# Altium PCB TailLightPrototype.PcbDoc
Units mm, origin at the board's own origin, x right, y up, seen from the top; angles counter-clockwise.
Board outline 55 x 30 mm, 2 copper layers (Top Layer, Bottom Layer); 8 components, 6 nets, 33 pads, 333 vias.
Unrouted connection lines stored in the file: 2.
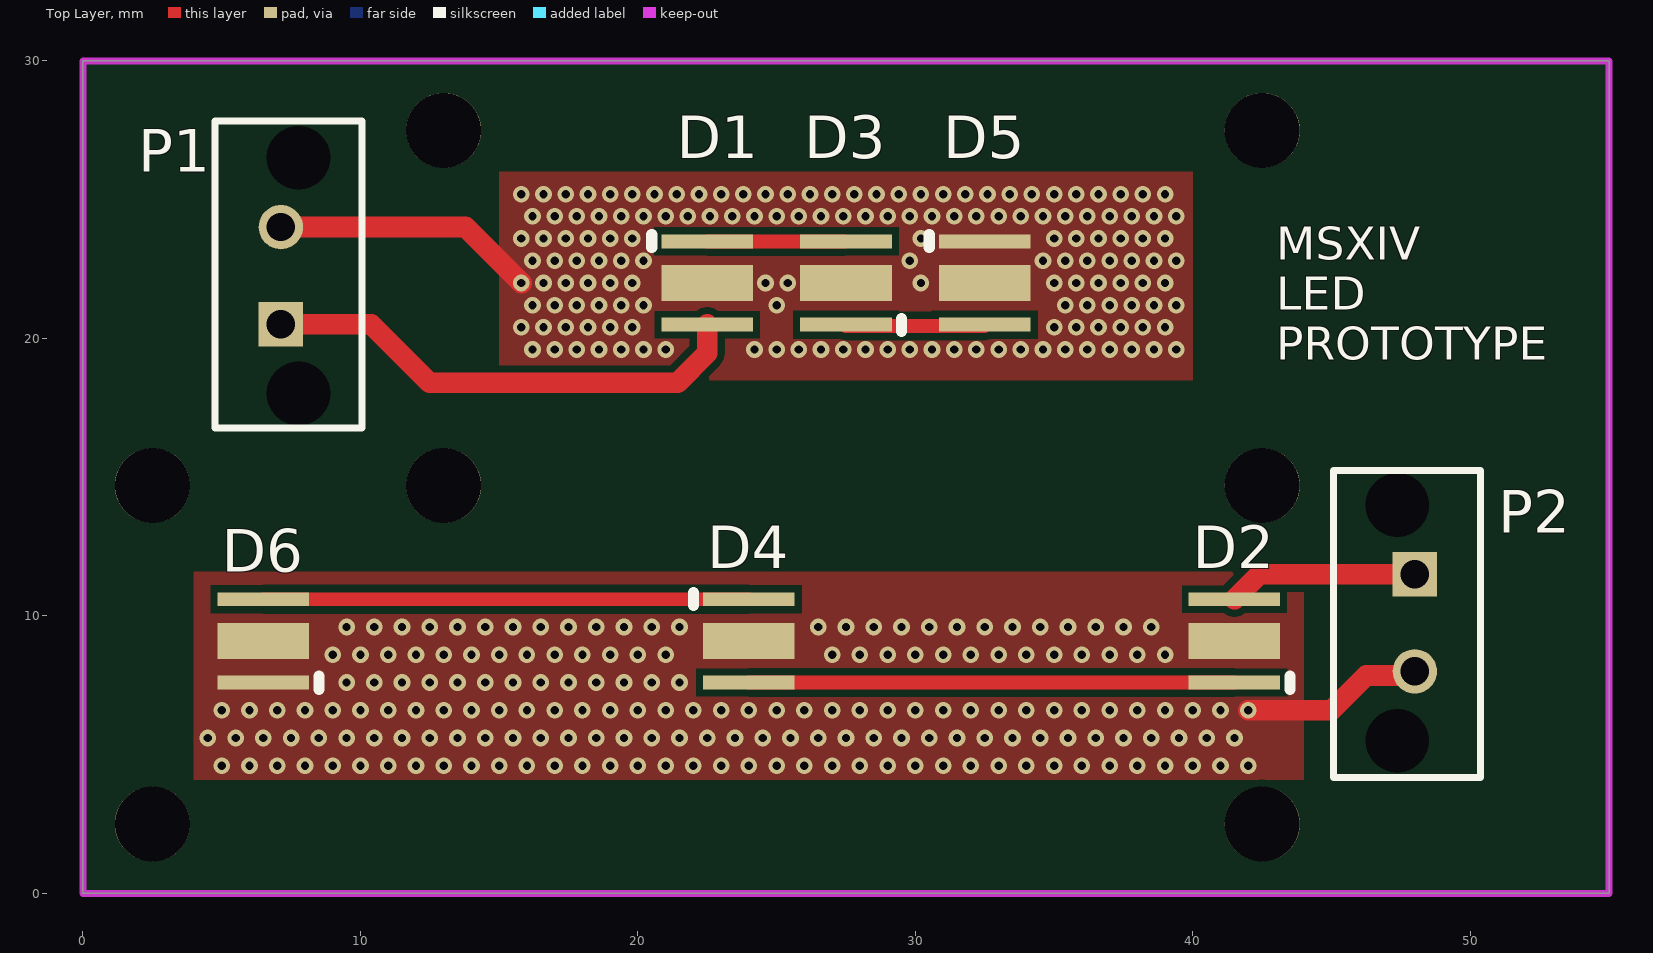
[diagram p0: Top Layer view]
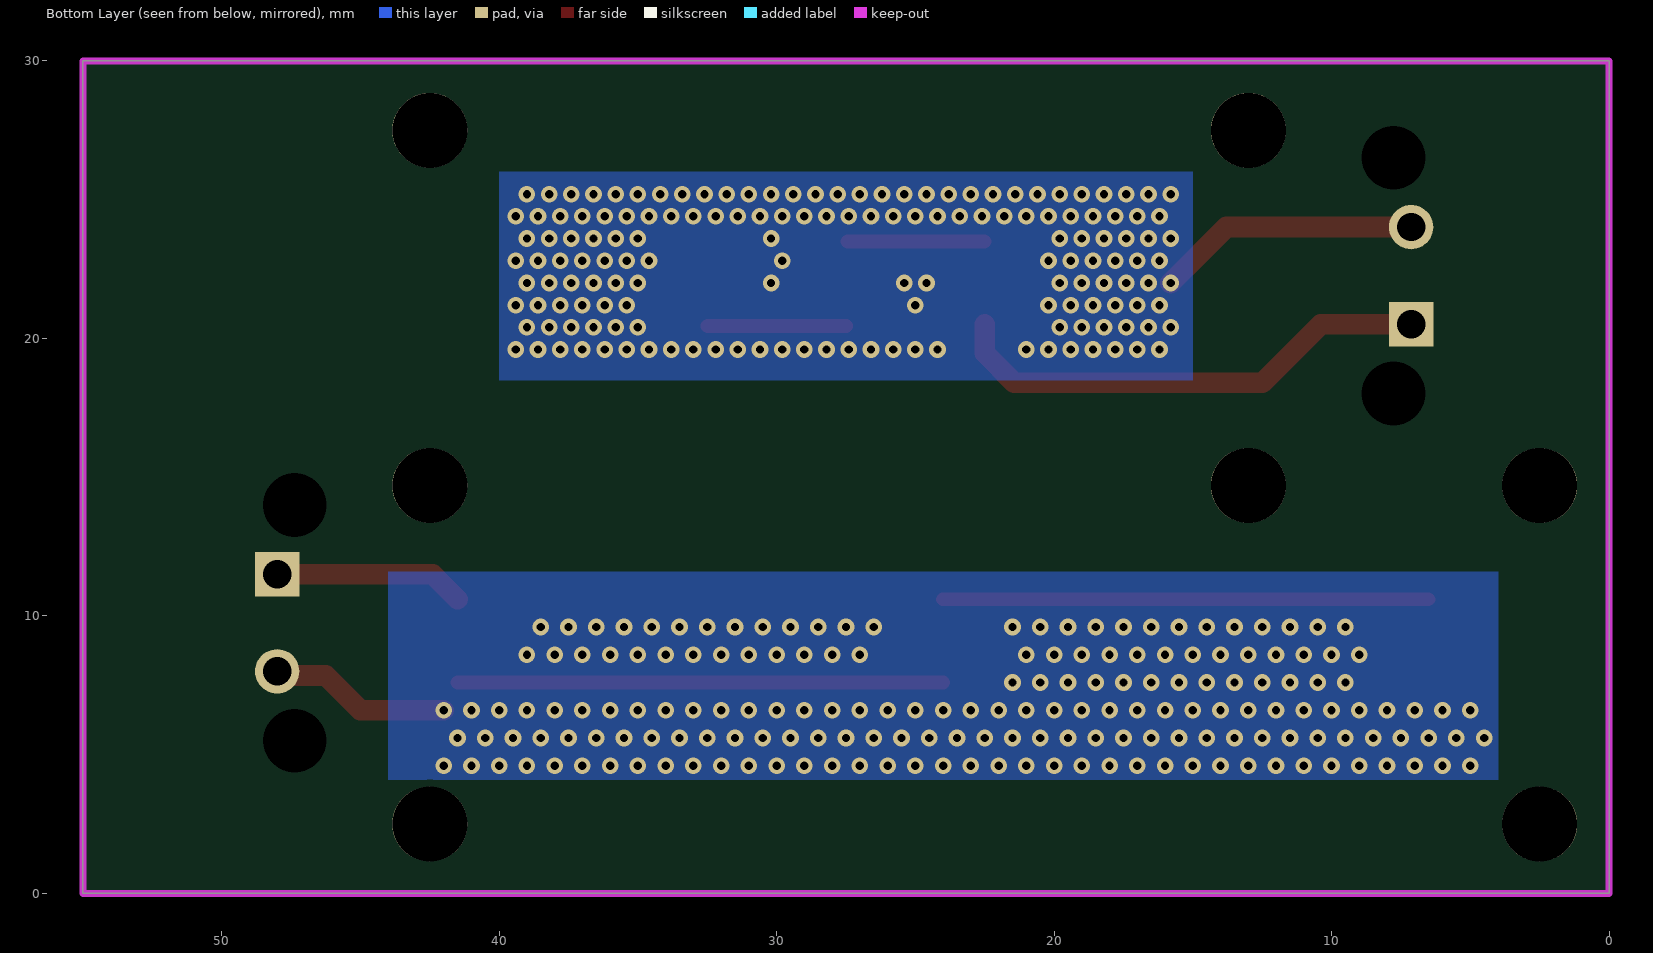
[diagram p1: Bottom Layer view, seen from below]
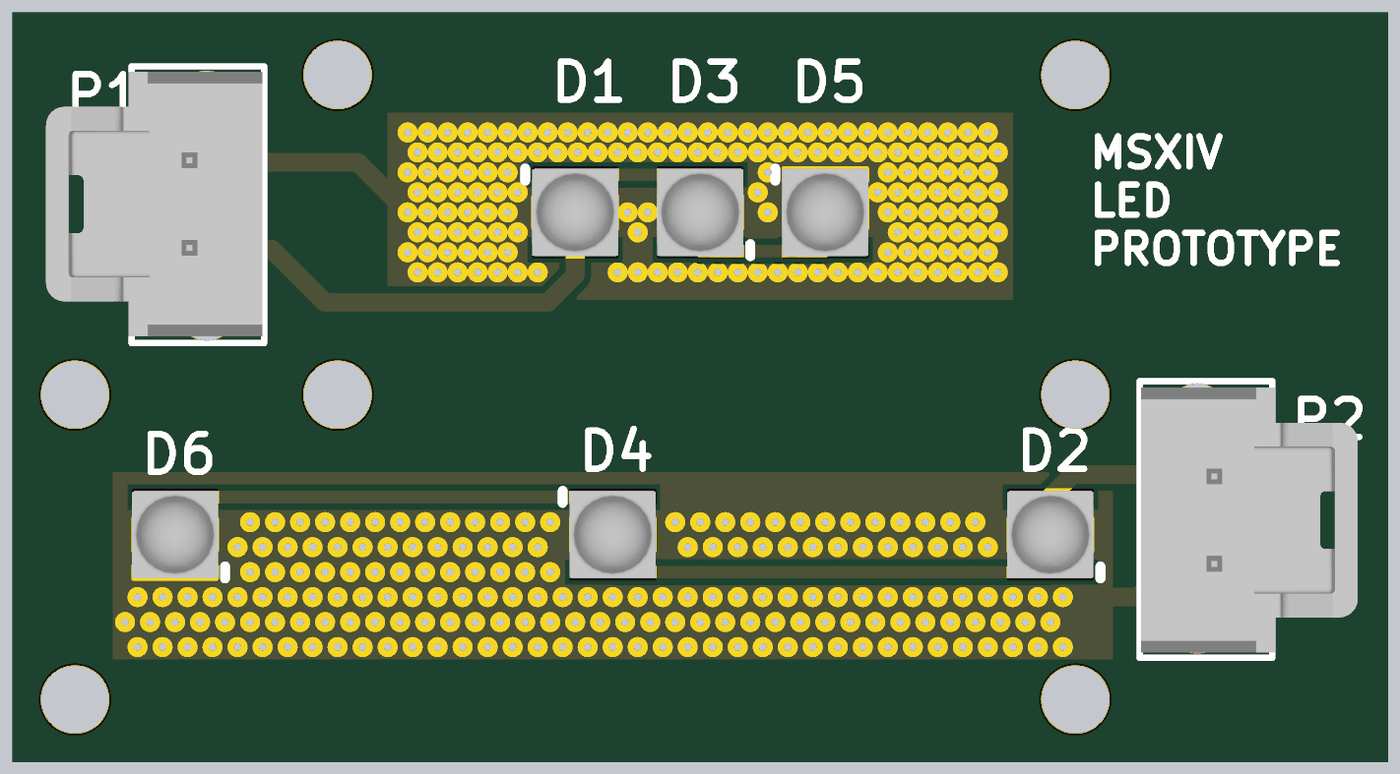
[diagram p2: 3D render of the assembled board from above, using the file's embedded part models]

## Layer stack, top to bottom
Top Solder: solder mask 0.0102, Solder Resist, Dk 3.5
Top Layer: signal copper 0.0356
Dielectric 1: dielectric 0.32, FR-4, Dk 4.8
Bottom Layer: signal copper 0.0356
Bottom Solder: solder mask 0.0102, Solder Resist, Dk 3.5

## Board outline
0,0 55,0 55,30 0,30

## Design rules (kind name [scope] priority, off if disabled: settings)
Clearance [All] p1: gap=0.254 ignorepadtopadclearanceinfootprint=FALSE except(0: Arc-Hole Track-Hole SMDPad-Hole THPad-Hole Via-Hole Fill-Hole Poly-Hole Region-Hole Text-Hole)
PolygonConnect [All] p1: connectstyle=Direct reliefconductorwidth=0.254 reliefentries=4 polygonreliefangle="90 Angle" airgapwidth=0.254
RoutingVias [All] p1: holewidth=0.711 width=1.27 viastyle="Through Hole" minholewidth=0.711 minwidth=1.27 maxholewidth=0.711 maxwidth=1.27
SolderMaskExpansion [All] p1: expansion=0.102
Width [All] p1: maxlimit=10 minlimit=0.254 preferedwidth=0.254
30 further rules are at their usual default settings.

## Components (designator, comment, footprint, x,y, rotation, side; value= is the part's Value field where it differs from the comment)
D1 "LED XLAMP XP-E RED SMD" "LED CREE XP-E2 1414 2-SMD" 22.5,22 r90 top
D2 "LED XLAMP XP-E RED SMD" "LED CREE XP-E2 1414 2-SMD" 41.5,9.1 r270 top
D3 "LED XLAMP XP-E RED SMD" "LED CREE XP-E2 1414 2-SMD" 27.5,22 r270 top
D4 "LED XLAMP XP-E RED SMD" "LED CREE XP-E2 1414 2-SMD" 24,9.1 r90 top
D5 "LED XLAMP XP-E RED SMD" "LED CREE XP-E2 1414 2-SMD" 32.5,22 r90 top
D6 "LED XLAMP XP-E RED SMD" "LED CREE XP-E2 1414 2-SMD" 6.5,9.1 r270 top
P1 "CONN 2POS ULTRA-FIT 0.138\"" "CONN, 2POS ULTRA-FIT" 7.132,20.514 r90 top
P2 "CONN 2POS ULTRA-FIT 0.138\"" "CONN, 2POS ULTRA-FIT" 48,11.5 r270 top

## Footprints (in the part's own frame and the unit in brackets; to place one, negate y for a bottom-side part, rotate by r counter-clockwise, add the part's x,y. Pads: shape width x height; smd on the part's side, far side on the other; paste and mask are expansions set on the pad)
"CONN, 2POS ULTRA-FIT" [mm] "2 Positions Header, Shrouded Connector 0.138\" (3.50mm) Through Hole Gold"
  rect 1.6x1.6 hole 1.02: 1(0,0)
  round 1.6 hole 1.02: 2(3.5,0)
  round 1.6 hole 2.3: ""(-2.5,-0.63) ""(6,-0.63)
  silkscreen extent -3.74,-2.93 7.33,2.37, body extent -3.48,-2.87 7.12,5.79, height 13.85
"LED CREE XP-E2 1414 2-SMD" [mm]
  rect 0.5x3.3 smd: 1(-1.5,0) 3(1.5,0)
  rect 1.3x3.3 smd: 2(0,0)
  silkscreen extent 1.27,2 1.75,2, body extent -1.73,-1.73 1.73,1.73, height 2.28

## Part data
D1 D2 D3 D4 D5 D6: "LED Lighting Color XLamp?XP-E2 Red 623nm (620nm ~ 625nm) 1414 (3535 Metric)", Case/Package=SMD/SMT, Color=Red, Forward Voltage=2.2V, Manufacturer=Cree, Manufacturer Part Number=XPEBRD-L1-0000-00902, Max Current Rating=1A, Supplier Part Number 1="XP-E2 RED", Test Current=350mA, Test Temperature=25°C, Thermal Resistance of Package=5°C/W, Lead Free="Lead Free", Mount="Surface Mount", Packaging="Tape and Reel", Pricing 1="1=2, 10=1.9, 100=1.6998, 250=1.54584, 500=1.44786 (USD)", Stock 1=1651, Supplier 1=Digi-Key, Viewing Angle=130°, Wavelength=625nm
P1 P2: "2 Positions Header, Shrouded Connector 0.138\" (3.50mm) Through Hole Gold", Current Rating=-, Insulation Color=Black, Manufacturer 1="Molex, LLC", Manufacturer Part Number 1=1722861302, Material Flammability Rating="UL94 V-0", Operating Temperature="-40°C ~ 120°C", Supplier Part Number 1=WM11673-ND, Voltage=400V, ComponentLink1Description=http://www.molex.com/pdm_docs/sd/1722861302_sd.pdf, ComponentLink1URL=http://www.molex.com/pdm_docs/sd/1722861302_sd.pdf, Connector Type=Header, Contact Finish - Mating=Gold, Contact Finish - Post=Tin, Contact Finish Thickness - Mating="30µin (0.76µm)", Contact Finish Thickness - Post="60µin (1.52µm)", Contact Length - Mating=-, Contact Length - Post="0.126\" (3.20mm)", Contact Material="Copper Alloy", Contact Shape=Square, Contact Type="Male Pin", Fastening Type="Latch Holder", Ingress Protection=-, Insulation Height="0.465\" (11.80mm)", Insulation Material="Liquid Crystal Polymer (LCP)", Mated Stacking Heights=26.99mm, Mounting Type="Through Hole", Number of Positions=2, Number of Positions Loaded=All, Number of Rows=1, Overall Contact Length=-, Packaging=Tray, Part Status=Active, Pitch - Mating="0.138\" (3.50mm)", Row Spacing - Mating=-, Series=UltraFit, Shrouding="Shrouded - 4 Wall", Style="Board to Board or Cable", Supplier 1=Digi-Key, Termination="Kinked Pin, Solder"

## Free pads (board coordinates)
  round 2.7 hole 2.7: 1(2.5,2.5) 2(42.5,2.5) 3(42.5,27.5) 4(13,27.5) ""(2.5,14.7) ""(13,14.7) ""(42.5,14.7)

## Via types
v1: diameter 0.6, hole 0.3, Top Layer to Bottom Layer, 333 vias

## Nets (pads, with @x,y where several pads share a name; then routed paths per layer and width w, separated by ;. In a path a pad name is that pad's centre, name@x,y a point inside that pad or via, vN(x,y) a via of type N, cw(c..) or ccw(c..) an arc to the next point about the centre after c; other vN are vias at no path point)
6V6: D1.1 D2.1 P1.1 P2.1 | length 24.6
  Top Layer w0.75: P1.1 10.386,20.514 12.5,18.4 21.423,18.4 22.5,19.477 D1.1 ; D2.1 42.4,11.5 P2.1
GND: D1.2 D2.2 D3.2 D4.2 D5.2 D5.3 D6.2 D6.3 P1.2 P2.2 | length 16.2
  Top Layer w0.75: P1.2@7,24.014 P1.2 13.786,24.014 v1(15.8,22) ; v1(42,6.6) 45,6.6 46.25,7.85 P2.2@48,7.85
  other v1: 5,4.6 6,4.6 7,4.6 8,4.6 9,4.6 10,4.6 11,4.6 12,4.6 13,4.6 14,4.6 15,4.6 16,4.6 17,4.6 18,4.6 19,4.6 20,4.6 21,4.6 22,4.6 23,4.6 24,4.6 25,4.6 26,4.6 27,4.6 28,4.6 29,4.6 30,4.6 31,4.6 32,4.6 33,4.6 34,4.6 35,4.6 36,4.6 37,4.6 38,4.6 39,4.6 40,4.6 41,4.6 42,4.6 4.5,5.6 5.5,5.6 6.5,5.6 7.5,5.6 8.5,5.6 9.5,5.6 10.5,5.6 11.5,5.6 12.5,5.6 13.5,5.6 14.5,5.6 15.5,5.6 16.5,5.6 17.5,5.6 18.5,5.6 19.5,5.6 20.5,5.6 21.5,5.6 22.5,5.6 23.5,5.6 24.5,5.6 25.5,5.6 26.5,5.6 27.5,5.6 28.5,5.6 29.5,5.6 30.5,5.6 31.5,5.6 32.5,5.6 33.5,5.6 34.5,5.6 35.5,5.6 36.5,5.6 37.5,5.6 38.5,5.6 39.5,5.6 40.5,5.6 41.5,5.6 5,6.6 6,6.6 7,6.6 8,6.6 9,6.6 10,6.6 11,6.6 12,6.6 13,6.6 14,6.6 15,6.6 16,6.6 17,6.6 18,6.6 19,6.6 20,6.6 21,6.6 22,6.6 23,6.6 24,6.6 25,6.6 26,6.6 27,6.6 28,6.6 29,6.6 30,6.6 31,6.6 32,6.6 33,6.6 34,6.6 35,6.6 36,6.6 37,6.6 38,6.6 39,6.6 40,6.6 41,6.6 9.5,7.6 10.5,7.6 11.5,7.6 12.5,7.6 13.5,7.6 14.5,7.6 15.5,7.6 16.5,7.6 17.5,7.6 18.5,7.6 19.5,7.6 20.5,7.6 21.5,7.6 9,8.6 10,8.6 11,8.6 12,8.6 13,8.6 14,8.6 15,8.6 16,8.6 17,8.6 18,8.6 19,8.6 20,8.6 21,8.6 27,8.6 28,8.6 29,8.6 30,8.6 31,8.6 32,8.6 33,8.6 34,8.6 35,8.6 36,8.6 37,8.6 38,8.6 39,8.6 9.5,9.6 10.5,9.6 11.5,9.6 12.5,9.6 13.5,9.6 14.5,9.6 15.5,9.6 16.5,9.6 17.5,9.6 18.5,9.6 19.5,9.6 20.5,9.6 21.5,9.6 26.5,9.6 27.5,9.6 28.5,9.6 29.5,9.6 30.5,9.6 31.5,9.6 32.5,9.6 33.5,9.6 34.5,9.6 35.5,9.6 36.5,9.6 37.5,9.6 38.5,9.6 16.2,19.6 17,19.6 17.8,19.6 18.6,19.6 19.4,19.6 20.2,19.6 21,19.6 24.2,19.6 25,19.6 25.8,19.6 26.6,19.6 27.4,19.6 28.2,19.6 29,19.6 29.8,19.6 30.6,19.6 31.4,19.6 32.2,19.6 33,19.6 33.8,19.6 34.6,19.6 35.4,19.6 36.2,19.6 37,19.6 37.8,19.6 38.6,19.6 39.4,19.6 15.8,20.4 16.6,20.4 17.4,20.4 18.2,20.4 19,20.4 19.8,20.4 35,20.4 35.8,20.4 36.6,20.4 37.4,20.4 38.2,20.4 39,20.4 16.2,21.2 17,21.2 17.8,21.2 18.6,21.2 19.4,21.2 20.2,21.2 25,21.2 35.4,21.2 36.2,21.2 37,21.2 37.8,21.2 38.6,21.2 39.4,21.2 16.6,22 17.4,22 18.2,22 19,22 19.8,22 24.6,22 25.4,22 30.2,22 35,22 35.8,22 36.6,22 37.4,22 38.2,22 39,22 16.2,22.8 17,22.8 17.8,22.8 18.6,22.8 19.4,22.8 20.2,22.8 29.8,22.8 34.6,22.8 35.4,22.8 36.2,22.8 37,22.8 37.8,22.8 38.6,22.8 39.4,22.8 15.8,23.6 16.6,23.6 17.4,23.6 18.2,23.6 19,23.6 19.8,23.6 30.2,23.6 35,23.6 35.8,23.6 36.6,23.6 37.4,23.6 38.2,23.6 39,23.6 16.2,24.4 17,24.4 17.8,24.4 18.6,24.4 19.4,24.4 20.2,24.4 21,24.4 21.8,24.4 22.6,24.4 23.4,24.4 24.2,24.4 25,24.4 25.8,24.4 26.6,24.4 27.4,24.4 28.2,24.4 29,24.4 29.8,24.4 30.6,24.4 31.4,24.4 32.2,24.4 33,24.4 33.8,24.4 34.6,24.4 35.4,24.4 36.2,24.4 37,24.4 37.8,24.4 38.6,24.4 39.4,24.4 15.8,25.2 16.6,25.2 17.4,25.2 18.2,25.2 19,25.2 19.8,25.2 20.6,25.2 21.4,25.2 22.2,25.2 23,25.2 23.8,25.2 24.6,25.2 25.4,25.2 26.2,25.2 27,25.2 27.8,25.2 28.6,25.2 29.4,25.2 30.2,25.2 31,25.2 31.8,25.2 32.6,25.2 33.4,25.2 34.2,25.2 35,25.2 35.8,25.2 36.6,25.2 37.4,25.2 38.2,25.2 39,25.2
NetD1_3: D1.3 D3.1 | length 5
  Top Layer w0.254: D3.1@27.45,23.5 D3.1@27.5,23.45
  Top Layer w0.5: D1.3 D3.1@27.45,23.5
NetD2_3: D2.3 D4.1 | length 17.5
  Top Layer w0.5: D4.1 D2.3
NetD3_3: D3.3 D5.1 | length 5
  Top Layer w0.5: D3.3@27.5,20.45 D5.1@32.5,20.45
NetD4_3: D4.3 D6.1 | length 17.5
  Top Layer w0.5: D6.1 D4.3
pads on no net: P1. P2.

## Polygon pours and split planes (outlines as drawn)
GND on Top Layer "GND_L01_P000" (solid, pour order 0): 15,26 15,18.5 40,18.5 40,26
GND on Top Layer "Top Layer-GND" (solid, pour order 4): 44,4.1 4,4.1 4,11.6 44,11.6
no net on Bottom Layer "Bottom Layer-No Net" (solid, pour order 8): 44,4.1
GND on Bottom Layer "Bottom Layer-GND" (solid, pour order 6): 44,4.1 4,4.1 4,11.6 44,11.6
GND on Bottom Layer "GND_L02_P002" (solid, pour order 2): 15,26 15,18.5 40,18.5 40,26
no net on Bottom Solder (solid): 44,4.1 4,4.1 4,11.6 44,11.6
no net on Bottom Solder "GND_L01_P000" (solid): 15,26 15,18.5 40,18.5 40,26

## Keep-outs
Keep-Out Layer:
  the board outline again, w0.254

## Silkscreen, mask and mechanical layers (free items; w line width, h text height)
Top Overlay:
  text "MSXIV / LED  / PROTOTYPE" at 43,19.231 h1.2